# EAGLE board ml-rf (EAGLE 5.04)
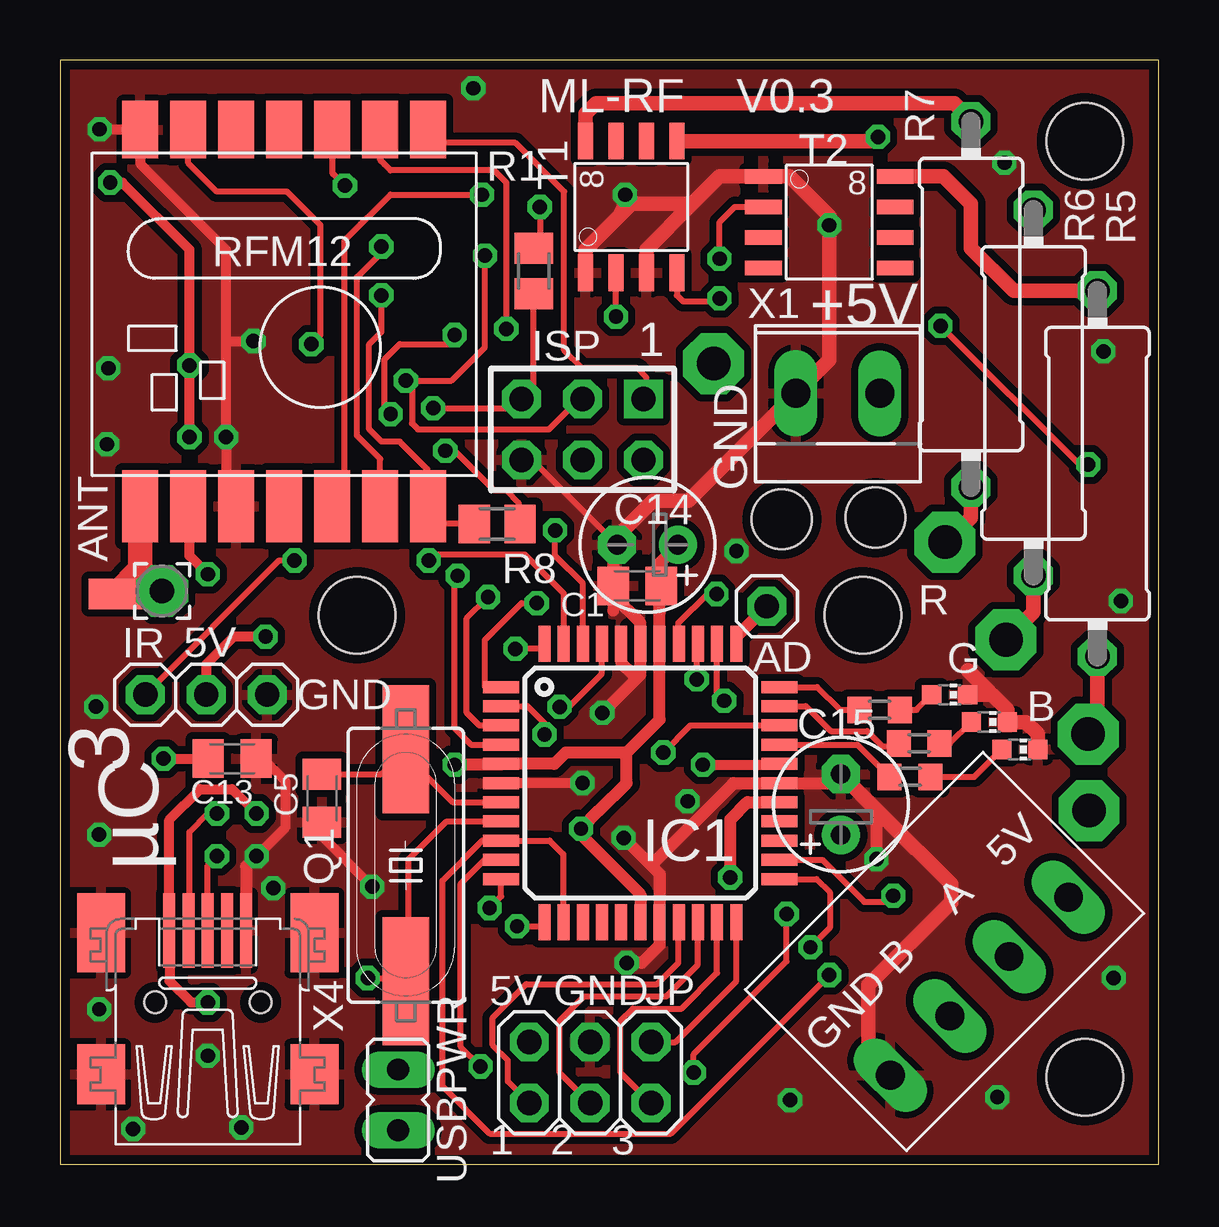
[diagram p0: board, top side]
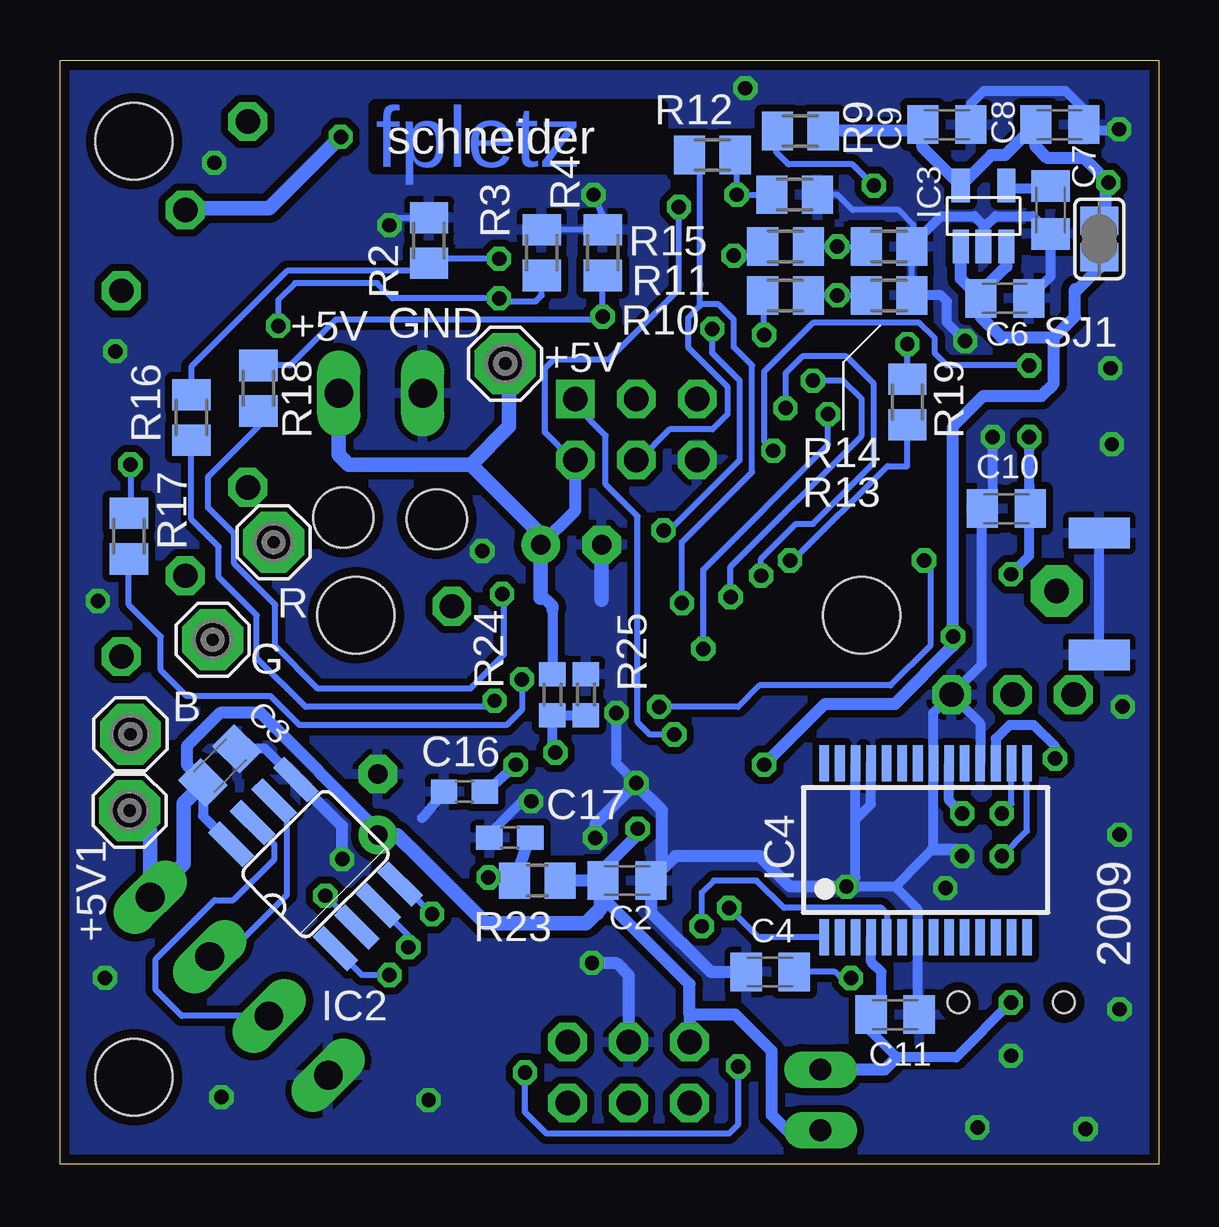
[diagram p1: board, bottom side, seen from below]

Size 45.8 x 46 mm. Coordinates in mm from the lower left corner, seen from the top.
Outline: 0,0 45.8,0 45.8,46 0,46 0,0
Copper layers (1*16): Top 0.035mm / dielectric 1.5mm / Bottom 0.035mm
Design rules "default *": minimum track width 0.2mm, minimum drill 0.5mm, track to track 0.2mm, track to pad 0.2mm, pad to pad 0.2mm, via to via 0.2mm, smd to smd 0mil, copper to edge 0.4mm, drill to drill 8mil, minimum pad ring 0.3mm, minimum via ring 8mil, stop-mask expansion 4mil, vias tented up to drill 0mil, thermal gap 10mil
Holes 3.2 mm at 12.38,22.86 33.46,22.86 42.71,42.61 42.71,3.61
Holes 2.5 mm at 33.99,26.93 30.09,26.86
tRestrict: area 23.7,21 to 23.7,22.4; area 23.7,21 to 23.9,22.4
bRestrict: area 12.3,15.8 to 12.3,17.4

## Footprints (pad centres in the part's own frame; a part is rotated, then mirrored left to right if it is on the bottom)
SE14 = drill 1.397 pad 2.54 octagon: MP 0,0
1X01 = drill 1.016 octagon: 1 0,0
2,15/1,0 = drill 1.016 pad 2.159 octagon: 1 0,0
C0805K = smd 1.3 x 1.6: 1 -1,0; 2 1,0
E2,5-6 = drill 0.813 pad 1.6 round: + -1.27,0 | drill 0.813 pad 1.6 octagon: - 1.27,0
C0603 = smd 1.1 x 1: 1 -0.85,0; 2 0.85,0
TQFP44 = smd 1.5 x 0.5: 1 -5.8,4; 2 -5.8,3.2; 3 -5.8,2.4; 4 -5.8,1.6; 5 -5.8,0.8; 6 -5.8,0; 7 -5.8,-0.8; 8 -5.8,-1.6; 9 -5.8,-2.4; 10 -5.8,-3.2; 11 -5.8,-4; 23 5.8,-4; 24 5.8,-3.2; 25 5.8,-2.4; 26 5.8,-1.6; 27 5.8,-0.8; 28 5.8,0; 29 5.8,0.8; 30 5.8,1.6; 31 5.8,2.4; 32 5.8,3.2; 33 5.8,4 | smd 0.5 x 1.5: 12 -4,-5.8; 13 -3.2,-5.8; 14 -2.4,-5.8; 15 -1.6,-5.8; 16 -0.8,-5.8; 17 0,-5.8; 18 0.8,-5.8; 19 1.6,-5.8; 20 2.4,-5.8; 21 3.2,-5.8; 22 4,-5.8; 34 4,5.8; 35 3.2,5.8; 36 2.4,5.8; 37 1.6,5.8; 38 0.8,5.8; 39 0,5.8; 40 -0.8,5.8; 41 -1.6,5.8; 42 -2.4,5.8; 43 -3.2,5.8; 44 -4,5.8
SO08 = smd 0.66 x 2.032: 1 -1.905,-3.073; 2 -0.635,-3.073; 3 0.635,-3.073; 4 1.905,-3.073; 5 1.905,3.073; 6 0.635,3.073; 7 -0.635,3.073; 8 -1.905,3.073
SOT-23-5 = smd 0.662 x 1.397: 1 -0.953,-1.27; 2 0,-1.27; 3 0.953,-1.27 | smd 0.762 x 1.397: 4 0.953,1.27; 5 -0.953,1.27
SSOP28 = smd 0.4 x 1.5: 1 -4.225,-3.625; 2 -3.575,-3.625; 3 -2.925,-3.625; 4 -2.275,-3.625; 5 -1.625,-3.625; 6 -0.975,-3.625; 7 -0.325,-3.625; 8 0.325,-3.625; 9 0.975,-3.625; 10 1.625,-3.625; 11 2.275,-3.625; 12 2.925,-3.625; 13 3.575,-3.625; 14 4.225,-3.625; 15 4.225,3.625; 16 3.575,3.625; 17 2.925,3.625; 18 2.275,3.625; 19 1.625,3.625; 20 0.975,3.625; 21 0.325,3.625; 22 -0.325,3.625; 23 -0.975,3.625; 24 -1.625,3.625; 25 -2.275,3.625; 26 -2.925,3.625; 27 -3.575,3.625; 28 -4.225,3.625
AVR-ISP-6 = drill 1.016 square: 1 -2.54,-1.27 | drill 1.016 octagon: 2 -2.54,1.27; 3 0,-1.27; 4 0,1.27; 5 2.54,-1.27; 6 2.54,1.27
2X03 = drill 1.016 octagon: 1 -2.54,-1.27; 2 -2.54,1.27; 3 0,-1.27; 4 0,1.27; 5 2.54,-1.27; 6 2.54,1.27
CHIP-LED0603 = smd 0.8 x 0.8: A 0,-0.75; C 0,0.75
SMD1,27-2,54 = smd 1.27 x 2.54: 1 0,0
HC49UP@1 = smd 5.334 x 1.93: 1 -4.826,0; 2 4.826,0
M0805 = smd 1.3 x 1.6: 1 -0.95,0; 2 0.95,0
0414/15 = drill 1.016 octagon: 1 -7.62,0; 2 7.62,0
R0603 = smd 1 x 1.1: 1 -0.85,0; 2 0.85,0
R0805 = smd 1.3 x 1.5: 1 -0.95,0; 2 0.95,0
RFM12 = smd 1.5 x 2.4: 1 -5,-9.7; 2 -3,-9.7; 3 -1,-9.7; 4 1,-9.7; 5 3,-9.7; 6 5,-9.7; 7 7,-9.7 | smd 1.5 x 3: 8 7,6; 9 5,6; 10 3,6; 11 1,6; 12 -1,6; 13 -3,6; 14 -5,6
SJ = smd 1.168 x 1.6: 1 -0.762,0; 2 0.762,0
SO-8 = smd 1.524 x 0.61: 1 -2.743,1.27; 2 -2.743,0; 3 -2.743,-1.27; 4 -2.743,-2.54; 5 2.743,-2.54; 6 2.743,-1.27; 7 2.743,0; 8 2.743,1.27
JP1 = drill 0.914 long: 1 0,-1.27; 2 0,1.27
W237-102-3.5-1.2 = drill 1.2 long: 1 -1.7,0 | drill 1.194 long: 2 1.8,0
RIACON-4 = drill 1.2 long: 1 0,5.25; 2 0,1.75; 3 0,-1.75; 4 0,-5.25
1X03-SMALL = drill 1.016 octagon: 1 -2.54,0; 2 0,0; 3 2.54,0
32005-201 = smd 3.1 x 0.5: 1 3,1.6; 2 3,0.8; 3 3,0; 4 3,-0.8; 5 3,-1.6 | smd 2.5 x 2: M1 -3,-4.45; M2 -3,4.45 | smd 3.3 x 2: M3 2.9,4.45; M4 2.9,-4.45 | hole 0.9: 0,2.2; 0,-2.2

## Placement (x,y rotation side)
+5V  SE14  [SE14]  27.25,33.35 0 bottom
+5V1  SE14  [SE14]  42.9,14.73 0 bottom
AD  [1X01]  29.46,23.24 0 top
ANT  [2,15/1,0]  4.25,23.88 0 top
B  SE14  [SE14]  42.86,17.91 0 bottom
C1  100nF  [C0805K]  24.07,24.09 180 top
C2  100nF  [C0805K]  22.16,11.81 0 bottom
C3  100nF  [C0805K]  39.13,16.6 45 bottom
C4  22pF  [C0805K]  16.19,8 0 bottom
C5  22pF  [C0805K]  10.92,15.24 90 top
C6  10µF  [C0805K]  6.41,36.07 0 bottom
C7  10nF  [C0805K]  4.51,39.75 270 bottom
C8  10µF  [C0805K]  4.13,43.31 0 bottom
C9  100nF  [C0805K]  8.83,43.31 0 bottom
C10  100nF  [C0805K]  6.35,27.3 0 bottom
C11  100nF  [C0805K]  10.99,6.22 0 bottom
C13  100nF  [C0805K]  7.18,16.89 180 top
C14  100µF  [E2,5-6]  24.49,25.8 180 top
C15  100µF  [E2,5-6]  32.55,14.97 90 top
C16  [C0603]  28.94,15.51 0 bottom
C17  [C0603]  27.05,13.59 0 bottom
G  SE14  [SE14]  39.43,21.84 0 bottom
IC1  MEGA164P/324P/644P-AU  [TQFP44]  24.19,15.88 0 top
IC2  MAX481CSA  [SO08]  35.15,12.5 45 bottom
IC3  [SOT-23-5]  7.3,39.5 0 bottom
IC4  FT232RL  [SSOP28]  9.72,13.08 0 bottom
ISP  AVR-ISP-6  [AVR-ISP-6]  21.78,30.61 180 top
JP2  [2X03]  22.1,3.81 180 top
LED1  [CHIP-LED0603]  40.01,17.27 270 top
LED2  [CHIP-LED0603]  38.73,18.41 270 top
LED3  [CHIP-LED0603]  37.08,19.56 270 top
PAD1  [SMD1,27-2,54]  2.48,23.75 90 top
PAD2  [SMD1,27-2,54]  2.48,21.21 270 bottom
PAD3  [SMD1,27-2,54]  2.48,26.29 90 bottom
Q1  18.432MHz  [HC49UP@1]  14.41,12.45 90 top
R  SE14  [SE14]  36.89,25.91 0 bottom
R1  10K  [M0805]  19.75,37.21 90 top
R2  100K  [M0805]  30.42,38.48 90 bottom
R3  100K  [M0805]  25.72,37.97 90 bottom
R4  100K  [M0805]  23.18,37.97 90 bottom
R5  5R  [0414/15]  43.24,28.77 270 top
R6  5R  [0414/15]  40.58,32.13 270 top
R7  8R  [0414/15]  37.97,35.81 270 top
R8  100K  [M0805]  18.22,26.67 0 top
R9  10K  [M0805]  14.94,43.04 0 bottom
R10  0  [M0805]  15.56,36.2 0 bottom
R11  0  [M0805]  15.56,38.23 0 bottom
R12  0  [M0805]  18.61,42.04 0 bottom
R13  -  [M0805]  11.24,36.2 0 bottom
R14  -  [M0805]  11.24,38.23 0 bottom
R15  -  [M0805]  15.18,40.39 0 bottom
R16  10R  [M0805]  40.32,31.1 270 bottom
R17  10R  [M0805]  42.93,26.16 270 bottom
R18  10R  [M0805]  37.53,32.32 270 bottom
R19  10K  [M0805]  10.48,31.75 90 bottom
R20  200R  [R0603]  35.43,16.13 180 top
R21  200R  [R0603]  35.81,17.53 180 top
R22  200R  [R0603]  34.16,18.92 180 top
R23  xH  [R0805]  25.91,11.81 180 bottom
R24  20K  [R0603]  25.27,19.56 90 bottom
R25  10K  [R0603]  23.88,19.56 270 bottom
RFM12  FRM12  [RFM12]  10.35,33.4 180 top
SJ1  [SJ]  2.48,38.54 90 bottom
T1  IRF7103  [SO-8]  23.18,39.88 90 top
T2  IRF7103  [SO-8]  32.07,39.88 0 top
USBPWR  [JP1]  14.1,2.67 180 top
X1  [W237-102-3.5-1.2]  32.38,32.11 0 top
X2  RIACON-4  [RIACON-4]  38.33,7.4 315 top
X3  [1X03-SMALL]  6.1,19.56 0 top
X4  MINI-USB-SCHIELD-32005-201  [32005-201]  6.16,6.73 90 top

## Library data of the parts
+5V +5V1 B G R = solpad
AD JP2 = pinhead
ANT PAD1-PAD3 = wirepad
C1-C11 C13-C17 R1-R4 R8-R25 = rcl
IC1 = avr-5
IC2 = maxim
IC3 = regulators
IC4 = ftdichip
ISP = atmel
LED1-LED3 = led
Q1 = crystal
R5-R7 = rclml
RFM12 = RFM12
SJ1 USBPWR = jumper
T1 T2 = transistor-fet+irf7201
X1 = clamps
X2 = con-riacon
X3 = pinhead-3small
X4 = con-cypressindustries

## Nets
!IRQ: IC1.42 RFM12.2
!RE: IC1.24 IC2.2
!RST: IC1.4 ISP.5 R1.1
!SS: IC1.44 R10.1
+3V3: C8.1 C9.1 C10.2 IC3.5 R8.2 R9.2 RFM12.9 SJ1.2
+5V: +5V1.MP +5V.MP C1.1 C2.1 C3.1 C6.1 C14.+ C15.+ IC1.5 IC1.17 IC1.38 IC2.8 IC3.1 IC3.3 ISP.2 JP2.5 R1.2 R23.1 R24.2 SJ1.1 USBPWR.2 X1.2 X2.1 X3.2
A: IC2.6 X2.2
AIN0: IC1.31 R24.1 R25.2
B: IC2.7 X2.3
BY: C7.1 IC3.4
DE: IC1.23 IC2.3
GB: R2.1 R16.1 T2.2
GG: R3.1 R17.1 T1.4
GND: C1.2 C2.2 C3.2 C4.1 C5.1 C6.2 C7.2 C8.2 C9.2 C10.1 C11.2 C13.1 C14.- C15.- C16.1 C17.1 IC1.6 IC1.18 IC1.28 IC1.39 IC1.40 IC2.5 IC3.2 IC4.7 IC4.18 IC4.21 IC4.25 IC4.26 ISP.6 JP2.3 LED1.C LED2.C LED3.C PAD2.1 PAD3.1 R2.2 R3.2 R4.2 R13.2 R14.2 R15.2 R25.1 RFM12.7 RFM12.10 T1.1 T1.3 T2.1 X1.1 X2.4 X3.3 X4.5 X4.M1 X4.M2 X4.M3 X4.M4
GR: R4.1 R18.1 T1.2
IO1: IC1.19 JP2.6
IO2: IC1.20 JP2.4
IO3: IC1.21 JP2.2
IR: IC1.41 X3.1
JP: IC1.22 JP2.1
LO1: IC1.30 R20.2
LO2: IC1.32 R21.2
LO3: IC1.33 R22.2
MISO: IC1.2 ISP.1 RFM12.1
MOSI: IC1.1 ISP.4 R12.1
N$1: R7.1 T1.8
N$3: R11.2 R14.1 RFM12.13
N$4: R6.1 T1.5
N$5: R5.1 T2.8
N$6: R12.2 R15.1 RFM12.12
N$7: R7.2 R.MP
N$8: G.MP R6.2
N$9: B.MP R5.2
N$10: IC4.16 X4.2
N$11: R9.1 RFM12.3
N$12: R19.2 RFM12.6
N$13: ANT.1 PAD1.1 RFM12.8
N$14: R8.1 R10.2 R13.1 RFM12.14
N$15: C17.2 IC1.27 R23.2
N$16: IC4.15 X4.3
N$20: C13.2 IC4.17
N$21: LED1.A R20.1
N$22: LED2.A R21.1
N$23: LED3.A R22.1
N$27: AD.1 IC1.34
N$29: C16.2 IC1.29
PB: IC1.35 R16.2
PG: IC1.36 R17.2
PR: IC1.37 R18.2
RF12RST: IC1.43 R19.1
RXD: IC1.9 IC1.13 IC2.1
SCK: IC1.3 ISP.3 R11.1
TXD: IC1.10 IC2.4
USBRX: IC1.12 IC4.5
USBTX: IC1.11 IC4.1
VBUS: C11.1 IC4.4 IC4.20 USBPWR.1 X4.1
XTAL1: C5.2 IC1.7 Q1.2
XTAL2: C4.2 IC1.8 Q1.1

## Tracks (layer width: path | path; a pad name or v marks a point on that pad's centre or on a via)
!IRQ  (via drill 0.6)
  Top 0.254: 13.53,41.66 13.78,41.4 18.1,41.4 18.61,40.89 v18.61,34.8 | 13.53,41.66 13.4,41.78 | RFM12.2 13.35,41.83 13.53,41.66 | IC1.42 21.79,24.19 20.64,25.34 v20.64,26.4
  Bottom 0.254: v18.61,34.8 18.61,33.78 17.46,32.64 17.46,29.34 20.4,26.4 v20.64,26.4
!RE  (via drill 0.6)
  Top 0.254: IC1.24 31.77,12.68 33.53,10.92 34.48,10.92 v34.73,11.18
  Bottom 0.254: IC2.2 33.45,9.91 33.59,9.91 33.59,10.03 v34.73,11.18
!RST  (via drill 0.6)
  Top 0.254: 19.62,36.32 19.69,36.32 R1.1 | 19.62,36.07 19.75,36.2 R1.1 | R1.1 19.75,36.32 | R1.1 19.75,32.26 19.37,31.88 ISP.5 18.86,31.5 v15.56,31.5 | v16.57,24.51 16.45,24.51 16.45,18.16 17.13,17.48 IC1.4
  Bottom 0.254: v15.56,31.5 15.56,32.96 14.86,33.66 13.02,33.66 11.87,32.51 11.87,29.21 14.41,26.67 15.11,26.67 16.57,25.21 v16.57,24.51
!SS  (via drill 0.6)
  Top 0.254: v16.45,34.54 16.19,34.29 16.19,34.16 14.16,34.16 13.53,33.53 13.53,31.5 v13.78,31.24 | IC1.44 19.98,21.46 v18.99,21.46
  Bottom 0.254: R10.1 16.45,36.2 v16.45,34.54 | v13.78,31.24 13.78,29.97 18.99,24.77 v18.99,21.46
+3V3  (via drill 0.6)
  Top 0.254: v16.07,29.72 16.45,29.72 18.1,28.07 18.61,28.07 19.11,27.56 19.11,26.67 R8.2
  Top 0.305: RFM12.9 5.4,27.45
  Top 0.406: v2.1,40.89 2.6,40.89 5.4,38.1 v5.4,33.27 v5.4,30.29 | RFM12.9 5.38,27.37 5.4,27.37 5.4,25.34 v6.16,24.57
  Bottom 0.254: v16.07,29.72 16.45,30.1 16.45,33.02 14.41,35.05 9.97,35.05 9.34,34.42 9.34,33.78 8.83,33.27 v5.4,33.27
  Bottom 0.406: 9.84,43.31 C9.1 10.08,43.05 | 14.16,43.05 14,43.05 R9.2 | 5.27,43.18 5.02,43.18 5.02,43.2 C8.1 5.13,43.07 5.14,43.05 | v2.1,40.89 2.22,40.77 2.22,41.02 | 5.4,28.32 5.4,25.34 v6.16,24.57 | 5.4,28.32 v5.4,30.29 | C10.2 5.4,27.35 5.4,28.32 | SJ1.2 2.48,39.37 2.22,39.62
  Bottom 0.508: 9.84,43.31 9.84,42.35 IC3.5 6.99,42.04 6.41,42.04 5.27,43.18 | 10.08,43.05 14,43.05 | 5.14,43.05 5.14,42.42 4.64,41.91 3.11,41.91 2.22,41.02 | 2.22,40.77 2.22,39.62
+5V  (via drill 0.6)
  Top 0.254: R1.2 19.75,38.23 20,38.48 v20,39.88
  Top 0.406: IC1.5 18.39,16.64 | X3.2 6.1,20.83 7.24,21.97 v8.57,21.97
  Top 0.508: 18.39,16.64 v16.45,16.64 | 22.48,14.73 | 22.48,14.73 v21.72,13.97 21.72,13.72 24.19,11.24 IC1.17 | IC1.5 20.61,16.68 21.08,17.14 23.62,17.14 | IC1.38 | IC1.38 24.99,22.99 | 24.99,22.99 24.99,25.04 C14.+ | 22.48,14.73 23.62,15.88 23.62,17.14 | 23.62,17.14 24.99,18.52 IC1.38 | C1.1 24.99,23.84 24.99,22.99
  Bottom 0.254: ISP.2 24.45,29.34 25.59,30.48 25.59,33.15 25.21,33.53 22.92,33.53 20,36.45 v20,39.88
  Bottom 0.406: 7.43,36.07 7.56,36.2 | 7.43,36.07 C6.1 | 7.43,35.31 7.43,36.07 | 2.48,37.34 SJ1.1 | 3.49,36.45 3.37,36.45 | C3.1 39.84,14.5 IC2.8 | 25.27,23.11 R24.2
  Bottom 0.508: IC3.1 8.26,36.89 7.56,36.2 6.35,37.4 IC3.3 | 3.49,36.45 3.49,35.31 4.38,34.42 | 4.38,34.42 6.54,34.42 7.43,35.31 | v16.45,16.64 13.91,19.18 10.99,19.18 8.57,21.59 v8.57,21.97 8.57,30.73 7.3,32 4.89,32 4.38,32.51 4.38,34.42 | 3.37,36.45 2.48,37.34 | C15.+ 32.55,13.91 37.43,18.8 39.12,18.8 40.51,17.4 40.51,16.64 39.84,15.96 C3.1 | v21.72,13.97 21.72,13.72 23.16,12.27 C2.1 | 23.37,10.54 23.37,10.41 | C2.1 23.16,11.1 19.56,7.49 19.56,6.22 | ISP.2 24.32,27.24 C14.+ | C2.1 R23.1 | 25.27,23.11 25.27,23.26 25.76,23.75 | 19.56,6.22 JP2.5 | USBPWR.2 15.49,1.4 16.13,2.03 16.13,4.7 17.65,6.22 19.56,6.22
  Bottom 0.61: X1.2 34.18,29.55 33.77,29.14 28.67,29.14 | 28.67,29.14 27.08,30.74 27.08,33.18 +5V.MP | 25.76,23.59 25.76,23.75 C14.+ 25.76,26.23 28.67,29.14 | C3.1 39.84,15.85 40.65,15.04 40.65,12.51 X2.1 42.04,13.87 +5V1.MP | C15.+ 31.74,13.7 30.8,12.76 | 30.8,12.76 30.48,12.45 | 30.8,12.76 28.07,10.03 23.88,10.03 23.37,10.54 23.24,10.67 23.24,11.73 C2.1
A
  Bottom 0.254: IC2.6 36.34,14.59 36.34,11.21 38.9,8.64 X2.2
AIN0  (via drill 0.6)
  Top 0.254: IC1.31 26.28,18.27 v25.15,17.14
  Bottom 0.406: v25.15,17.14 25.27,17.27 R24.1 R25.2
B
  Bottom 0.254: IC2.7 36.86,13.31 36.86,12.71 38.57,10.99 39.34,10.99 41.81,8.52 41.81,7.26 40.72,6.17 X2.3
BY
  Bottom 0.406: C7.1 4.51,40.64 6.22,40.64 IC3.4
DE  (via drill 0.6)
  Top 0.254: IC1.23 31.54,11.88 32.09,11.33 32.09,9.84 v31.28,9.03
  Bottom 0.254: v31.28,9.03 31.28,9.53 IC2.3
GB  (via drill 0.6)
  Top 0.254: T2.2 29.27,39.88 | v27.5,37.72 27.5,39.24 28.13,39.88 T2.2 | T2.2 29.4,39.88
  Bottom 0.254: R2.1 30.42,37.47 | R2.1 30.23,37.72 v27.5,37.72 | R2.1 30.42,37.21 36.32,37.21 40.32,33.21 R16.1
GG  (via drill 0.6)
  Top 0.254: T1.4 25.72,36.2 25.97,35.94 27.37,35.94 v27.5,36.07 | v36.7,34.92 42.48,29.15 v42.86,29.15
  Bottom 0.254: v27.5,36.07 27.37,36.07 | v27.5,36.07 31.94,36.07 32.58,36.7 36.01,36.7 36.7,36.01 v36.7,34.92 | R3.1 25.72,36.2 25.97,35.94 27.37,35.94 v27.5,36.07 | 42.86,27.05 42.86,26.73 | 42.86,27.05 R17.1 | v42.86,29.15 42.86,27.05
GND  (via drill 0.6)
  Top 0.254: 24.45,37.21 T1.3 24.57,37.01 | 24.96,10.16 24.96,10.11 IC1.18 24.96,10.03 | 21.91,37.21 21.78,37.34 | 32.09,38.99 32.07,38.99 v32.07,39.12 | 22.92,39.12 v23.56,40.39 | ISP.6 19.68,29.34 C14.-
  Top 0.406: v21.78,15.88 IC1.6 | 24.96,10.07 24.96,10.03 24.96,9.91 | 24.96,10.07 IC1.18 24.99,10.12 24.96,10.16 24.96,10.07 | 30.04,15.88 IC1.28 29.31,15.88 29.26,15.82 | 7.3,27.56 7.43,27.43 7.4,27.4 RFM12.10 7.35,27.51 7.3,27.56 | 7.3,27.56 6.92,27.94 v6.92,30.29 6.92,34.29 | v1.65,43.12 1.67,43.1 RFM12.7 3.29,43.1 3.24,43.05 3.24,43.31 3.37,43.18 3.37,41.66 6.92,38.1 6.92,34.29 | 6.92,34.29 v8.06,34.29 | v13.02,11.56 10.92,13.65 C5.1 | v8.19,12.83 9.4,14.03 9.4,15.94 8.45,16.89 C13.1 8.13,16.68
  Top 0.508: C15.- 32.18,15.88 30.04,15.88 28.07,15.88 24.64,12.45 | v34.04,12.7 34.04,14.22 34.3,14.49 | v23.5,13.59 24.64,12.45 | 24.64,12.45 24.99,12.09 IC1.18 24.99,9.12 24.26,8.38 v23.62,8.38 | X4.5 7.76,12.39 v8.19,12.83 | 23.07,23.07 C1.2 23.07,25.61 23.24,25.78 | 23.11,24.13 23.11,23.62 24.19,22.54 IC1.39 24.19,20.38 v22.61,18.8 | IC1.40 23.39,20.89 R25.1
  Top 0.61: 32.09,38.99 32.09,39.48 30.42,41.15 29.65,41.15 | 29.27,41.15 T2.1 29.65,41.15 | 29.65,41.15 27.5,41.15 26.35,40.01 | 26.35,40.01 24.45,38.1 24.45,37.21 | T1.1 21.91,37.21 21.91,38.1 22.92,39.12 23.81,40.01 26.35,40.01 | v32.07,39.12 32.07,33.51 X1.1 26.2,27.64 24.72,27.64 23.22,26.14 C14.- | X2.4 33.71,4.6 33.71,7.46 37.15,10.9 37.15,11.65 34.3,14.49 C15.- | LED1.C 40.76,17.92 40.26,18.41 LED2.C 39.48,18.93 38.86,19.56 38.73,19.56 | LED3.C 38.73,19.56 | 38.73,19.56 38.73,19.68 37.85,20.57
  Bottom 0.254: R3.2 23.37,38.92 23.3,38.86 23.24,38.92 R4.2 23.12,38.86 22.92,38.86 v23.56,40.39 | R2.2 31.75,39.43 v32.07,39.12 | R15.2 13.4,40.39 12.76,39.75 10.86,39.75 10.22,39.12 10.22,38.35 10.35,38.23 | 10.35,38.23 10.48,38.1 | 10.35,38.23 R14.2 10.29,36.26 10.35,36.2 R13.2 | 12,16.76 11.99,16.75 IC4.25
  Bottom 0.406: 7.24,39.05 6.79,39.5 5.25,39.5 C7.2 4.51,36.97 C6.2 | 7.24,39.05 7.3,38.99 7.3,38.35 7.18,38.23 IC3.2 | C9.2 7.83,43.32 7.94,43.43 7.81,43.56 7.81,44.2 7.3,44.7 3.87,44.7 3.13,43.96 C8.2 3.11,43.29 3.11,43.05 1.71,43.05 v1.65,43.12 | 10.22,38.35 9.08,39.5 7.68,39.5 7.24,39.05 | R13.2 9.08,36.2 8.83,35.94 8.83,35.05 v8.06,34.29 | 35.83,15.88 IC2.5 37.26,17.3 C3.2 | PAD2.1 PAD3.1 | 10.99,11.56 10.04,10.61 IC4.7 10.04,6.29 9.97,6.22 C11.2 10.03,6.18 | 10.99,11.56 v13.02,11.56 | 10.99,11.56 9.84,12.7 | 9.84,12.7 9.45,13.09 | v13.02,11.56 13.14,11.43 | 12.64,14.35 12.64,11.93 v13.02,11.56 | 12.64,14.35 IC4.26 | 12.64,14.35 11.99,15 11.99,16.75 | 9.84,12.7 9.43,13.11 | 9.43,13.11 9.4,13.14 9.4,16.7 IC4.21 9.4,18.8 X3.3 | 9.43,13.11 | v22.61,18.8 22.61,16.7 v21.78,15.88 | C16.1 30.71,14.41 | v6.92,30.29 6.92,27.3 C10.1 arc-90 7.37,27.29 7.37,20.83 X3.3 | C17.1 27.9,13.76 26.54,15.11 v26.16,15.11 | X3.3 9.08,19.11 | IC4.18 7.44,18.36 X3.3
  Bottom 0.508: 35.83,15.88 34.04,14.08 v34.04,12.7 | v23.5,13.59 23.5,14.16 v21.78,15.88 21.78,15.81 20.7,14.73 20.7,12.27 C2.2 | C2.2 20.14,12.83 16.64,12.83 15.37,11.56 v13.02,11.56 | C2.2 21.16,10.49 18.67,8 C4.1 | 9.43,13.11 8.48,13.11 v8.19,12.83 | v23.62,8.38 22.61,8.38 22.1,7.87 JP2.3
  Bottom 0.61: C14.- 23.22,23.51 | v21.78,15.88 21.54,15.64
  other vias: 6.16,4.51 39.07,2.79 28.2,25.54 1.96,29.99 44.22,23.46 1.63,13.73 39.37,41.72 43.5,33.86 8.89,11.49 3.05,1.46 7.56,1.52 1.64,6.45 1.5,19.06 2.01,33.16 43.92,7.76 17.23,44.82 30.44,2.66
  pour Bottom (isolate 0.305): -0.89,46.35 -1.02,-0.64 46.48,-0.64 46.35,46.35
  pour Top (isolate 0.305): -0.89,46.35 -1.02,-0.64 46.48,-0.64 46.35,46.35
GR  (via drill 0.6)
  Top 0.254: v23.18,35.31 T1.2
  Bottom 0.254: 23.18,37.08 R4.1 v23.18,35.31 23.18,35.18 34.31,35.18 36.21,33.27 R18.1 37.53,33.21 37.47,33.15
IO1
  Top 0.254: IC1.19 25.78,8.38 24.89,7.49 19.43,7.49 18.03,6.1 18.03,4.95 18.67,4.32 18.67,3.43 JP2.6
IO2
  Top 0.254: IC1.20 26.59,8.31 25.27,6.99 21.84,6.99 20.83,5.97 20.83,3.81 JP2.4
IO3
  Top 0.254: IC1.21 27.39,7.96 25.91,6.48 23.88,6.48 23.37,5.97 23.37,3.81 JP2.2
IR  (via drill 0.6)
  Top 0.254: X3.1 9.14,25.15 v9.78,25.15 | v20.83,19.05 21.21,19.05 22.59,20.43 IC1.41
  Bottom 0.254: v9.78,25.15 9.53,24.89 9.53,21.59 11.18,19.94 16.64,19.94 17.53,19.05 v20.83,19.05
JP
  Top 0.254: IC1.22 28.19,7.62 25.65,5.08 JP2.1
LO1
  Top 0.254: IC1.30 33.24,17.48 R20.2
LO2
  Top 0.254: IC1.32 31.09,19.07 32.13,18.03 33.66,18.03 34.29,17.4 34.84,17.4 R21.2
LO3
  Top 0.254: IC1.33 31.56,19.88 32.51,18.92 R22.2
MISO  (via drill 0.6)
  Top 0.254: ISP.1 24.32,31.75 24.45,31.88 24.45,32.77 24.07,33.15 21.78,33.15 21.02,33.91 21.02,40.51 18.99,42.55 15.3,42.55 15.3,43.05 RFM12.1 | 18.41,19.09 IC1.2 19.48,19.07 20.2,18.36 v20.2,17.9
  Top 0.61: RFM12.1 15.3,43.05 15.3,43.56
  Bottom 0.254: ISP.1 24.32,31.62 23.05,30.35 23.05,28.32 21.72,26.99 21.72,18.41 21.2,17.9 v20.2,17.9
MOSI  (via drill 0.6)
  Top 0.254: v19.88,23.37 19.24,23.37 17.71,21.84 17.71,19.9 17.74,19.88 IC1.1
  Bottom 0.254: ISP.4 21.65,29.34 20.38,30.61 18.61,30.61 17.97,31.24 17.97,32.38 19.62,34.04 19.62,35.24 19.05,35.81 | R12.1 19.49,42.04 19.11,41.66 19.11,36.7 | 19.11,36.7 19.11,36.58 | v19.88,23.37 19.88,25.91 16.95,28.83 16.95,33.27 17.72,34.04 17.72,35.18 18.35,35.81 19.05,35.81 | 19.11,36.7 19.11,35.75 19.05,35.81
N$1
  Top 0.61: R7.1 38.04,43.43 37.27,44.2 22.35,44.2 21.91,43.75 T1.8
N$3  (via drill 0.6)
  Top 0.254: RFM12.13 13.35,29.39 12.38,30.35 12.38,36.96 13.4,37.97 v13.4,38.23
  Bottom 0.254: R14.1 v13.4,38.23 R11.2
N$4  (via drill 0.6)
  Top 0.61: T1.5 33.92,42.62 v34.1,42.8
  Bottom 0.61: R6.1 40.58,39.81 37.08,39.81 v34.1,42.8
N$5
  Top 0.61: T2.8 36.83,41.15 37.97,40.01 37.97,38.16 39.75,36.39 43.18,36.39 43.24,36.45 R5.1
N$6  (via drill 0.6)
  Top 0.254: RFM12.12 11.35,27.42 11.87,27.94 11.87,38.48 13.78,40.39 v17.59,40.39
  Bottom 0.254: R12.2 17.59,42.04 v17.59,40.39 R15.1
N$7
  Top 0.61: 37.02,25.91 R.MP 36.96,25.91 37.97,26.92 R7.2
N$8
  Top 0.61: R6.2 40.58,22.99 G.MP
N$9
  Top 0.61: B.MP 42.86,17.97 43.24,18.35 R5.2
N$10  (via drill 0.6)
  Top 0.254: X4.2 5.36,9.99 5.4,10.03 5.4,13.84 6.16,14.61 v6.54,14.61
  Bottom 0.254: IC4.16 6.14,15.01 v6.54,14.61
N$11  (via drill 0.6)
  Top 0.254: 11.49,41.15 v11.87,40.77 | 11.49,41.15 11.37,41.27 | RFM12.3 11.35,41.29 11.49,41.15
  Bottom 0.254: v11.87,40.77 12.76,41.66 15.43,41.66 15.94,42.16 15.94,43.05 15.92,43.04 R9.1
N$12  (via drill 0.6)
  Top 0.254: RFM12.6 5.35,41.7 6.54,40.51 9.46,40.51 10.86,39.12 10.86,34.54 v10.48,34.16
  Bottom 0.254: 10.48,32.64 R19.2 v10.48,34.16
N$13
  Top 1.016: 3.35,24.78 RFM12.8 | 3.35,24.78 ANT.1 | PAD1.1 2.32,23.75 3.35,24.78
N$14  (via drill 0.6)
  Top 0.254: 15.43,26.67 15.43,27.43 15.38,27.43 RFM12.14 15.35,28.19 | 15.43,26.67 15.43,26.61 | 15.35,28.19 15.35,28.27 | v13.4,36.2 13.4,34.67 12.89,34.16 12.89,30.61 13.4,30.1 14.16,30.1 15.3,28.96 15.3,28.19 15.35,28.19 | 15.43,26.67 15.3,26.67 | R8.1 15.43,26.67
  Bottom 0.254: R13.1 v13.4,36.2 R10.2 14.67,36.2
N$15  (via drill 0.6)
  Top 0.508: v27.94,11.94 27.94,14.35 28.66,15.07 IC1.27
  Bottom 0.508: v27.94,11.94 26.98,11.94 R23.2 C17.2
N$16  (via drill 0.6)
  Top 0.254: 6.16,9.65 X4.3 6.16,12.45 v6.54,12.83
  Bottom 0.254: IC4.15 5.49,13.88 v6.54,12.83
N$20  (via drill 0.6)
  Top 0.406: v4.32,16.89 C13.2
  Bottom 0.406: IC4.17 6.79,17.72 6.22,18.29 5.21,18.29 4.32,17.4 v4.32,16.89
N$21
  Top 0.254: R20.1 38.11,16.13 LED1.A
N$22
  Top 0.254: R21.1 37.1,17.53 LED2.A
N$23
  Top 0.254: R22.1 35.7,18.92 LED3.A
N$27
  Top 0.254: IC1.34 28.19,21.97
  Top 0.508: 28.19,21.97 AD.1
N$29  (via drill 0.6)
  Top 0.406: v26.8,16.64 29.96,16.64 IC1.29
  Bottom 0.406: C16.2 28.07,15.49 v26.8,16.64
PB  (via drill 0.6)
  Top 0.254: IC1.35 27.39,19.6 v27.69,19.3
  Bottom 0.254: R16.2 40.32,26.86 39.18,25.72 39.18,24.45 37.59,22.86 37.59,21.08 35.56,19.05 27.94,19.05 v27.69,19.3
PG  (via drill 0.6)
  Top 0.254: IC1.36 26.54,21.62 v26.54,20.19
  Bottom 0.254: R17.2 42.93,23.3 41.59,21.97 41.59,20.57 40.51,19.49 37.02,19.49 35.81,18.29 27.18,18.29 26.54,18.92 v26.54,20.19
PR  (via drill 0.6)
  Top 0.254: v27.37,23.75 26.99,23.75 25.78,22.54 IC1.37
  Bottom 0.254: R18.2 37.53,30.73 39.63,28.64 39.63,27.35 38.54,26.26 38.54,25 36.83,23.3 36.83,21.59 35.05,19.81 28.7,19.81 27.3,21.21 27.3,23.69 v27.37,23.75
RF12RST  (via drill 0.6)
  Top 0.254: IC1.43 20.99,22.01 21.02,22.04 20.99,22.06 20.99,23.77 19.37,25.4 15.49,25.4 15.37,25.27 v15.37,25.15
  Bottom 0.254: 10.48,30.86 R19.1 10.48,29.08 11.3,29.08 15.24,25.15 v15.37,25.15
RXD  (via drill 0.6)
  Top 0.254: IC1.13 20.98,10.09 20.98,12.91 20.41,13.47 IC1.9 17.6,13.47 15.94,11.81 15.94,3.24 17.91,1.27 25.46,1.27 v32.07,7.87
  Bottom 0.254: IC2.1 34.35,9.02 | IC2.1 | v32.07,7.87 33.21,7.87 IC2.1
SCK  (via drill 0.6)
  Top 0.254: ISP.3 21.65,31.88 20.38,30.61 14.92,30.61 14.67,30.86 14.67,32.64 v14.41,32.64 16.32,32.64 17.72,34.04 v17.72,37.85 | v17.84,23.62 16.95,22.73 16.95,18.8 17.48,18.27 IC1.3
  Bottom 0.254: R11.1 16.57,38.23 16.95,37.85 v17.72,37.85 | v14.41,32.64 13.14,32.64 12.38,31.88 12.38,30.35 17.84,24.89 v17.84,23.62
TXD  (via drill 0.6)
  Top 0.254: 30.29,10.03 30.29,10.29 v30.29,10.41 30.29,8.45 26.42,4.57 v26.42,3.81 | IC1.10 17.69,12.68 16.7,11.68 16.7,4.89 v17.53,4.06
  Bottom 0.254: 31.63,11.75 31.94,12.06 | 31.63,11.75 IC2.4 | v30.29,10.41 31.63,11.75 | v17.53,4.06 17.53,1.65 17.91,1.27 25.53,1.27 26.42,2.16 v26.42,3.81
USBRX  (via drill 0.6)
  Top 0.254: IC1.12 20.02,9.91 v19.05,9.91
  Bottom 0.254: IC4.5 11.3,9.49 11.3,10.41 11.56,10.67 15.62,10.67 16.76,11.81 18.54,11.81 19.05,11.3 v19.05,9.91
USBTX  (via drill 0.6)
  Top 0.254: IC1.11 18.39,11.15 v17.91,10.67
  Bottom 0.254: 14.03,9.4 13.98,9.46 IC4.1 16.7,9.46 v17.91,10.67
VBUS  (via drill 0.6)
  Top 0.406: v8.19,14.61 7.18,15.62 5.84,15.62 4.56,14.34 X4.1 4.56,9.47 4.57,9.46 4.57,7.62 5.46,6.73 v6.16,6.73
  Bottom 0.406: C11.1 11.99,6.18 12.06,6.1 | IC4.4 11.99,8.43 11.56,8 11.56,6.65 C11.1 | IC4.20 8.74,15.15 v8.19,14.61 | v6.16,6.73 8.45,4.45 10.92,4.45 11.99,5.51 C11.1
  Bottom 0.508: USBPWR.1 11.43,3.94 10.92,4.45
XTAL1
  Top 0.254: Q1.2 14.16,17.27 16.36,15.07 IC1.7 | Q1.2 14.41,17.21 | C5.2 13.38,16.24 Q1.2
XTAL2  (via drill 0.6)
  Top 0.254: 14.54,7.62 14.54,12.7 16.12,14.28 IC1.8 | 14.54,7.62 14.41,7.49 Q1.1 14.41,7.37 | 14.54,7.62 14.41,7.75 v12.83,7.75
  Bottom 0.254: v12.83,7.75 13.03,7.54 13.49,8 C4.2

## Text on the board
Bottom: fpletz
tPlace: ML-RF | V0.3 | +5V | 1 | GND | IR | 5V | GND | 3 | µC | 5V | A | B | 5V | GND | JP | GND | 1 | 2 | 3
bPlace: schneider | GND | +5V | R | G | B | 2009